# EAGLE board IOTBeev0.22 (EAGLE 6.6.0)
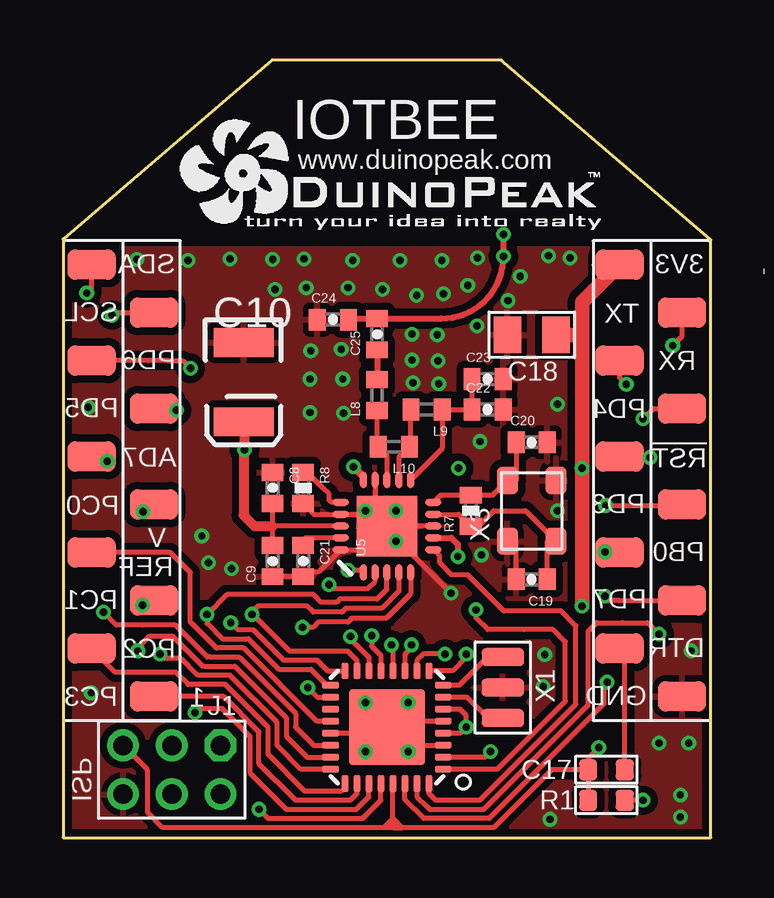
[diagram p0: board, top side]
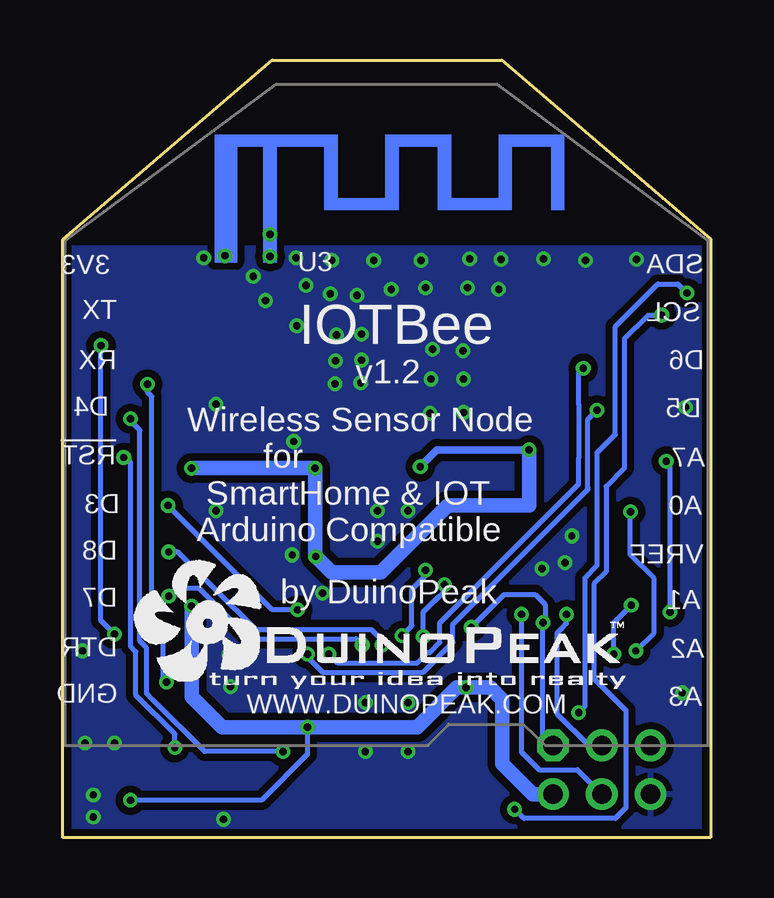
[diagram p1: board, bottom side, seen from below]

Size 26.99 x 32.42 mm. Coordinates in mm from the lower left corner, seen from the top.
Outline: 8.7,32.42 0,24.96 0,0 26.99,0 26.99,24.92 18.26,32.42 8.7,32.42
Copper layers (1*16): Top 0.035mm / dielectric 1.5mm / Bottom 0.035mm
Design rules "Sparkfun *": minimum track width 6mil, minimum drill 12mil, track to track 6mil, track to pad 6mil, pad to pad 6mil, via to via 6mil, smd to smd 0mil, copper to edge 3mil, drill to drill 10mil, minimum pad ring 10mil, minimum via ring 6mil, stop-mask expansion 2mil, vias tented up to drill 30mil, thermal gap 10mil
tRestrict: area 10.7,1.8 to 16.3,7.4

## Footprints (pad centres in the part's own frame; a part is rotated, then mirrored left to right if it is on the bottom)
2.4G-ANT = smd 0.305 x 0.305: 1 0.457,0.254; 2 2.286,0.254
0402-CAP = smd 0.7 x 0.9: 1 -0.65,0; 2 0.65,0
EIA3528 = smd 1.2 x 2.5: A 1.65,0; C -1.65,0
0603_S = smd 0.762 x 0.889: 1 -0.762,0; 2 0.762,0
0805 = smd 1.143 x 1.524: 1 -1.016,0; 2 1.016,0
CK_2X3_2.0 = drill 0.813 pad 1.27 octagon: 1 -1.016,2.032 | drill 0.813 pad 1.27: 2 -1.016,0; 3 -1.016,-2.032; 4 1.016,-2.032; 5 1.016,0; 6 1.016,2.032
C0402 = smd 0.7 x 0.9: 1 -0.65,0; 2 0.65,0
0402-RES = smd 0.7 x 0.9: 1 -0.65,0; 2 0.65,0
MLF32X = smd 0.7 x 0.3: 1 -2.35,1.75; 2 -2.35,1.25; 3 -2.35,0.75; 4 -2.35,0.25; 5 -2.35,-0.25; 6 -2.35,-0.75; 7 -2.35,-1.25; 8 -2.35,-1.75; 17 2.35,-1.75; 18 2.35,-1.25; 19 2.35,-0.75; 20 2.35,-0.25; 21 2.35,0.25; 22 2.35,0.75; 23 2.35,1.25; 24 2.35,1.75 | smd 0.3 x 0.7: 9 -1.75,-2.35; 10 -1.25,-2.35; 11 -0.75,-2.35; 12 -0.25,-2.35; 13 0.25,-2.35; 14 0.75,-2.35; 15 1.25,-2.35; 16 1.75,-2.35; 25 1.75,2.35; 26 1.25,2.35; 27 0.75,2.35; 28 0.25,2.35; 29 -0.25,2.35; 30 -0.75,2.35; 31 -1.25,2.35; 32 -1.75,2.35 | smd 3.175 x 3.175: HEAT 0,0
20P-SMD-2.0-BT = smd 2 x 1.27 bottom: 1 -9.7,9; 2 -12.3,7; 3 -9.7,5; 4 -12.3,3; 5 -9.7,1; 6 -12.3,-1; 7 -9.7,-3; 8 -12.3,-5; 9 -9.7,-7; 10 -12.3,-9; 11 9.7,-9; 12 12.3,-7; 13 9.7,-5; 14 12.3,-3; 15 9.7,-1; 16 12.3,1; 17 9.7,3; 18 12.3,5; 19 9.7,7; 20 12.3,9
QFN20_ALT1 = smd 2.515 x 2.515: 0 0,0 | smd 0.686 x 0.293: 1 -1.925,0.986; 2 -1.925,0.493; 3 -1.925,0; 4 -1.925,-0.493; 5 -1.925,-0.986; 11 1.925,-0.986; 12 1.925,-0.493; 13 1.925,0; 14 1.925,0.493; 15 1.925,0.986 | smd 0.293 x 0.686: 6 -0.986,-1.925; 7 -0.493,-1.925; 8 0,-1.925; 9 0.493,-1.925; 10 0.986,-1.925; 16 0.986,1.925; 17 0.493,1.925; 18 0,1.925; 19 -0.493,1.925; 20 -0.986,1.925
XTAL_3X2 = smd 0.762 x 1.778: 1 -1.27,0; 2 0,0; 3 1.27,0
X3225 = smd 1.143 x 0.889: 1 -1.27,1.016; 2 -1.27,-1.016; 3 1.27,-1.016; 4 1.27,1.016

## Placement (x,y rotation side)
ANT1  [2.4G-ANT]  20.64,23.97 0 bottom
C8  10nF  [0402-CAP]  8.73,14.57 270 top
C9  1nF  [0402-CAP]  8.73,11.53 90 top
C10  10uF  [EIA3528]  7.52,18.99 270 top
C17  100nF  [0603_S]  22.64,2.83 180 top
C18  10u  [0805]  19.53,20.96 180 top
C19  22pF  [0402-CAP]  19.53,10.76 180 top
C20  22pF  [0402-CAP]  19.53,16.48 0 top
C21  33nF  [0402-CAP]  10,11.53 270 top
C22  2.2nF  [0402-CAP]  17.68,17.84 0 top
C23  4.7pF  [0402-CAP]  17.68,19.11 0 top
C24  1.0pF  [0402-CAP]  11.24,21.59 0 top
C25  1.5pF  [0402-CAP]  13.08,20.99 90 top
J1  CK_2X3_2.0  [CK_2X3_2.0]  4.53,2.83 270 top
L8  3.9nH  [C0402]  13.08,18.45 90 top
L9  2.7nH  [C0402]  15.14,17.84 180 top
L10  8.2nH  [C0402]  13.78,16.29 180 top
R1  10k  [0603_S]  22.64,1.56 180 top
R7  1M  [0402-RES]  16.99,13.62 90 top
R8  22K  [0402-RES]  10,14.57 270 top
U1  MEGA8  [MLF32X]  13.49,4.6 180 top
U3  [20P-SMD-2.0-BT]  13.49,14.88 0 bottom
U5  NRF24L01ALT1  [QFN20_ALT1]  13.49,12.99 90 top
U$2  [DUINOPEAK-LOGO-0.6]  4.83,25.34 0 top
U$3  [DUINOPEAK-LOGO-0.7]  24.07,6.19 0 bottom
X1  8MHz  [XTAL_3X2]  18.32,6.25 90 top
X3  16MHz  [X3225]  19.53,13.62 90 top

## Library data of the parts
ANT1 = template (quxiaohui quxiaohui 的冲突副本 2013-09-17)
C8-C10 C19-C25 L8-L10 R7 R8 = SparkFun
C17 C18 R1 X1 X3 = CPT_SMD
J1 = CONNECTER
U1 = ICs_v54
U3 = Duinopeak-Module
U5 = Testing
U$2 U$3 = Duinopeak-Logo

## Nets
!RESET: C17.2 J1.3 R1.2 U1.29 U3.5
+3V3: C8.2 C9.2 C10.A C18.1 J1.6 R1.1 U1.4 U1.6 U1.18 U3.1 U5.7 U5.15 U5.18
ADC6: U1.19
ADC7: U1.22 U3.16
ANT: ANT1.2 C24.2 C25.2
AREF: U1.20 U3.14
CE: U1.13 U5.1
CSN: U1.14 U5.2
DTR: C17.1 U3.9
GND: ANT1.1 C8.1 C9.1 C10.C C18.2 C19.2 C20.2 C21.2 C22.2 C23.2 C24.1 J1.4 R8.2 U1.3 U1.5 U1.21 U1.HEAT U3.10 U5.0 U5.8 U5.14 U5.17 U5.20 X1.2 X3.1 X3.3
IRQ: U1.32 U5.6
MISO: J1.1 U1.16 U5.5
MOSI: J1.5 U1.15 U5.4
N$11: U1.7 X1.1
N$13: U1.8 X1.3
N$19: C19.1 R7.1 U5.9 X3.2
N$20: C20.1 R7.2 U5.10 X3.4
N$22: L8.1 L10.2 U5.13
N$23: C22.1 C23.1 L9.1 U5.11
N$24: R8.1 U5.16
N$25: C21.1 U5.19
N$26: L9.2 L10.1 U5.12
N$27: C25.1 L8.2
PB0: U1.12 U3.7
PC0: U1.23 U3.15
PC1: U1.24 U3.13
PC2: U1.25 U3.12
PC3: U1.26 U3.11
PD3: U1.1 U3.6
PD4: U1.2 U3.4
PD5: U1.9 U3.17
PD6: U1.10 U3.18
PD7: U1.11 U3.8
RX: U1.30 U3.3
SCK: J1.2 U1.17 U5.3
SCL: U1.28 U3.19
SDA: U1.27 U3.20
TX: U1.31 U3.2

## Tracks (layer width: path | path; a pad name or v marks a point on that pad's centre or on a via)
!RESET  (via drill 0.3)
  Top 0.203: J1.3 3.52,2.81 3.52,1.05 4.16,0.41 13.75,0.41 | 13.75,0.41 13.74,0.42 | 13.24,0.41 13.37,0.41 13.75,0.79 | 13.75,0.79 13.75,0.67 | 13.75,0.67 13.62,0.54 13.87,0.54 13.75,0.41 | 13.75,0.41 14.13,0.41 | 14.13,0.41 13.75,0.79 | U1.29 13.74,0.67 13.75,0.67 | 14.13,0.41 17.94,0.41 20.35,2.83 C17.2 | C17.2 R1.2 | U3.5 23.23,15.84 v24.45,15.84 | C17.2 21.88,3.3 v22.32,3.75
  Bottom 0.203: v22.32,3.75 22.32,4.32 23.94,5.94 23.94,7.75 24.16,7.97 24.16,15.56 arc-90 v24.45,15.84
+3V3  (via drill 0.3)
  Top 0.203: U1.4 16.54,4.35 v16.8,4.61 16.8,5.1 16.54,5.35 U1.6 | v24.16,1.56 R1.1 | U1.18 10.59,5.85 v10.19,6.25 | U5.18 8.73,12.99 | 8.73,12.99 C8.2 | C9.2 8.73,12.99
  Top 0.254: U5.7 16.18,12.49 16.45,12.22 v16.45,11.72
  Top 0.305: U5.15 12.51,15.05 v12.1,15.46
  Top 0.406: 8.73,12.99 7.97,12.99 7.53,13.43 7.56,13.46 v7.56,16.16 7.56,17.3 C10.A
  Top 0.61: v21.62,9.65 v21.62,15.4 21.62,19.84 21.62,21.24 | 21.62,21.24 21.62,21.46 21.62,22.32 U3.1 | C18.1 21.34,20.95 arc90 21.62,21.24
  Bottom 0.203: v24.16,1.56 18.7,1.56 16.8,3.46 v16.8,4.61
  Bottom 0.305: v12.1,15.46 11.4,16.16 v7.56,16.16
  Bottom 0.61: v21.62,15.4 v16.48,15.4 16.48,11.75 v16.45,11.72 15.78,11.05 13.75,11.05 10.95,13.84 7.56,13.84 v7.56,16.16 | J1.6 7.4,1.81 8.67,3.08 8.67,5.75 9.18,6.25 v10.19,6.25 10.57,6.25 12.22,4.6 v16.79,4.6 v16.8,4.61 v16.8,4.6 20.35,4.6 21.62,5.87 v21.62,9.65
ADC7  (via drill 0.3)
  Top 0.203: U1.22 10.43,3.85 9.68,4.6 9.68,5.17 7.33,7.52 6.13,7.52 6,7.52 5.33,8.19 4.67,8.86 3.3,8.86 2.22,8.86 v1.68,9.4 | v1.84,15.68 1.39,15.68 U3.16
  Bottom 0.203: v1.68,9.4 1.68,15.53 v1.84,15.68
ANT  (via drill 0.3)
  Top 0.254: C24.2 11.94,21.64 C25.2 15.76,21.64 arc90 ANT1.2 v18.35,25.15
  Bottom 0.254: 18.35,25.18 arc-90 18.41,25.24 18.32,25.24 arc-90 18.29,25.27 18.29,24.29 arc90 ANT1.2
  other vias: 18.35,24.23
AREF
  Top 0.203: U1.20 10.58,4.85 7.52,7.91 6.38,7.91 5.3,8.99 5.3,11.05 4.47,11.88 U3.14
CE  (via drill 0.3)
  Top 0.203: U1.13 13.24,7.58 12.86,7.97 v12.86,8.41 | U5.1 12.42,11.14 v11.87,11.14
  Bottom 0.203: v12.86,8.41 12.45,8.83 12.45,10.32 12.45,10.35 11.87,10.92 v11.87,11.14
CSN  (via drill 0.3)
  Top 0.203: U1.14 12.74,7.51 11.97,8.29 v11.97,8.38 | v11.08,10.54 11.24,10.38 12.7,10.38 13,10.68 U5.2
  Bottom 0.203: v11.97,8.38 11.97,9.4 | 11.97,9.4 11.33,10.03 | 11.97,9.4 11.08,10.29 v11.08,10.54
DTR
  Top 0.203: C17.1 23.4,7.88 U3.9
GND  (via drill 0.3)
  Top 0.203: U1.21 13.24,4.35 U1.HEAT | U1.5 13.74,4.85 U1.HEAT | U1.3 14.24,3.85 U1.HEAT | v14.38,3.59 14.38,3.71 U1.HEAT | v14.38,5.62 14.38,5.49 U1.HEAT | v16.16,10.19 14,12.35 v13.87,12.35 13.87,12 U5.20 10.65,11.08 10,11.08 | C19.2 18.88,12.35 X3.1 | R8.2 10.45,13.48 U5.17 12.6,13.48 v12.6,13.62 13,14.02 U5.14 | C9.1 C21.2 10,11.08 | U5.8 13.87,12.99 v13.87,13.62 | 10,11.08 9.94,11.08 9.97,11.11 10.06,11.11 10.03,11.08 10,11.08
  Top 0.406: 12.6,13.48 13,13.48 U5.0 | U5.0 13.49,12.73 v13.87,12.35 | 13.87,12.99 U5.0
  other vias: 17.43,11.78 7.02,11.21 20,6.29 5.78,12.57 6.06,11.46 12.6,3.59 12.6,5.62 17.37,16.51 20.61,13.62 20.61,18.07 3.08,24.1 5.21,24.07 13.3,22.86 10.29,19.11 15.78,24.07 18.54,22.38 21.11,24.16 25.72,0.86 20.29,0.76 25.72,1.78 17.27,24.16 10.03,24.13 14.54,20.99 14.54,19.91 19.05,23.4 16.86,23.02 24.83,3.94 26.07,3.94 1.17,6.03 1.05,17.94 26.16,7.78 11.59,20.35 11.65,19.11 11.68,17.68 10.29,17.72 15.84,22.67 14.73,22.61 6.95,24.13 8.73,24.1 14.03,24.07 12.07,24.07 20.07,7.62 15.59,20.96 15.62,19.88 11.87,22.92 10.13,22.92 20.22,24.26 10.32,20.29 17.24,21.34 14.57,18.95 15.65,18.92 8.83,22.86
  pour Top (isolate 0.305): -0.19,24.54 26.8,24.54 26.83,-0.35 -0.16,-0.35
  pour Bottom (isolate 0.305): -0.19,24.57 26.8,24.57 26.83,-0.35 -0.16,-0.35
IRQ
  Top 0.203: U1.32 15.24,1.84 15.53,1.56 17.37,1.56 19.97,4.16 21.37,5.56 21.37,8.83 20.75,9.45 18.37,9.45 16.86,10.95 16.19,10.95 15.68,11.46 15.68,11.73 U5.6
MISO  (via drill 0.3)
  Top 0.203: v6.98,8.95 7.27,8.67 7.91,8.67 9.18,7.4 10.57,7.4 11.02,6.95 U1.16 | U5.5 14.48,10.16 13.46,9.14 12.03,9.14 11.87,8.99 10.64,8.99 10.41,8.76 v9.97,8.76
  Bottom 0.203: J1.1 6.89,4.17 6.98,4.27 v6.98,8.95 6.89,9.05 6.89,9.72 7.3,10.13 8.6,10.13 v9.97,8.76
MOSI  (via drill 0.3)
  Top 0.203: U1.15 12.24,7.38 11.84,7.78 9.43,7.78 7.91,9.3 v7.87,9.3 7.87,9.4 8.13,9.65 10.16,9.65 10.41,9.4 11.62,9.4 11.78,9.56 13.27,9.56 13.99,10.27 U5.4
  Bottom 0.203: J1.5 5.54,2.83 7.14,2.83 7.78,3.46 7.87,3.56 v7.87,9.3
N$11
  Top 0.203: U1.7 16.82,5.85 17.68,4.98 X1.1
N$13
  Top 0.203: U1.8 16.51,6.35 17.68,7.52 X1.3
N$19
  Top 0.203: C19.1 20.18,12.35 X3.2 19.27,13.62 17.94,13.62 17.29,12.97 R7.1 16.48,13.48 U5.9
N$20
  Top 0.203: 18.88,15.26 X3.4 | C20.1 18.88,14.89 X3.4 | X3.4 17.89,14.27 R7.2 15.72,14.27 U5.10
N$22
  Top 0.203: U5.13 13.49,15.92 L10.2 13.08,16.34 L8.1
N$23
  Top 0.203: C23.1 C22.1 L9.1 15.79,16.23 U5.11
N$24
  Top 0.203: U5.16 11.17,13.97 11.08,14.06 11.08,14.32 10.83,14.57 10.18,15.22 R8.1
N$25
  Top 0.203: U5.19 10.1,12.49 arc90 C21.1
N$26
  Top 0.203: U5.12 13.99,15.84 L10.1 14.49,16.35 L9.2
N$27
  Top 0.254: C25.1 L8.2
PB0  (via drill 0.3)
  Top 0.203: U1.12 13.74,7.97 v13.68,8.03 | v22.57,11.91 22.6,11.88 U3.7
  Bottom 0.203: v13.68,8.03 13.68,8.22 14.13,8.67 18.95,8.67 20.61,10.32 22.19,11.91 v22.57,11.91
PC0  (via drill 0.3)
  Top 0.203: U1.23 10.17,3.35 9.3,4.22 9.3,4.98 7.14,7.14 5.87,7.14 5.81,7.14 5.14,7.81 4.57,8.38 3.59,8.38 3.11,7.91 v3.11,7.78 | v3.33,13.59 3.63,13.88 U3.15
  Bottom 0.203: v3.11,7.78 2.35,8.54 2.35,10.79 3.33,11.78 v3.33,13.59
PC1  (via drill 0.3)
  Top 0.203: U1.24 9.91,2.85 8.92,3.84 8.92,4.79 6.95,6.76 5.62,6.76 4.92,7.46 4.35,7.46 4.22,7.46 v4.03,7.65 | v3.3,9.68 3.59,9.68 U3.13
  Bottom 0.203: v4.03,7.65 4.03,8.95 v3.3,9.68
PC2
  Top 0.203: U1.25 11.74,2.09 11.59,1.94 10.06,1.94 8.54,3.46 8.54,4.6 6.76,6.38 5.37,6.38 5.21,6.38 4.7,6.89 2.18,6.89 U3.12
PC3
  Top 0.203: U1.26 12.24,1.83 11.97,1.56 9.68,1.56 8.16,3.08 8.16,4.41 6.69,5.88 U3.11
PD3  (via drill 0.3)
  Top 0.203: U1.1 18.09,2.85 19.59,4.35 20.92,5.68 20.92,8.16 20.41,8.67 19.21,8.67 17.68,8.67 17.21,9.14 v17.21,9.49 | v22.61,13.84 25.75,13.84 U3.6
  Bottom 0.203: v17.21,9.49 18.26,9.49 v22.61,13.84
PD4  (via drill 0.3)
  Top 0.203: U1.2 17.58,3.35 v17.81,3.59 | v24.16,17.46 24.58,17.88 U3.4
  Bottom 0.203: v17.81,3.59 21.08,3.59 23.24,5.75 23.49,6 23.49,7.91 23.78,8.19 23.78,16.99 24.16,17.37 v24.16,17.46
PD5  (via drill 0.3)
  Top 0.203: v4.73,17.81 4.65,17.89 4.65,17.88 U3.17 | U1.9 16.22,6.95 16.8,7.52 v16.8,7.65
  Bottom 0.203: v4.73,17.81 5.11,17.43 5.11,14.57 5.11,14.51 10.73,8.89 10.73,8.13 11.97,6.89 16.16,6.89 16.8,7.52 v16.8,7.65
PD6  (via drill 0.3)
  Top 0.203: U1.10 14.74,7.38 15.02,7.65 v15.91,7.65 | U3.18 3.55,19.88 4.37,19.88 4.98,19.88 v5.3,19.56
  Bottom 0.203: v15.91,7.65 15.53,7.27 12.22,7.27 11.78,7.71 11.68,7.71 11.27,8.13 11.27,8.95 5.49,14.73 5.49,14.89 5.49,15.81 5.49,18.07 5.49,18.76 5.49,19.37 v5.3,19.56
PD7  (via drill 0.3)
  Top 0.203: U1.11 14.24,7.64 14.51,7.91 v14.51,8.03 | U3.8 23.17,9.88 22.75,9.88 v22.57,10.06
  Bottom 0.203: v14.51,8.03 14.76,8.29 19.21,8.29 20.81,9.89 20.83,9.91 21.3,10.38 22.16,10.38 22.26,10.38 v22.57,10.06
RX  (via drill 0.3)
  Top 0.203: U1.30 14.24,1.57 15.02,0.79 17.75,0.79 22.54,5.59 22.54,6.35 v22.67,6.48 | v23.46,18.89 23.19,19.17 U3.3
  Bottom 0.203: v23.46,18.89 23.46,18.57 23.27,18.38 23.27,8.6 22.83,8.16 22.83,6.64 v22.67,6.48
SCK  (via drill 0.3)
  Top 0.203: v6,9.3 6,8.92 6.64,8.29 7.71,8.29 8.99,7.02 10.32,7.02 10.98,6.35 U1.17 | 6.25,9.56 v6,9.3 | v6,9.3 6.83,10.13 10.45,10.13 10.76,9.81 11.4,9.81 11.53,9.94 13.08,9.94 13.49,10.35 U5.3
  Bottom 0.203: J1.2 5.08,3.84 6.38,5.14 6.38,8.54 6.16,8.76 6,8.92 v6,9.3
SCL  (via drill 0.3)
  Top 0.203: U1.28 13.24,1.56 12.48,0.79 8.54,0.79 v8.16,1.17 | v2.03,21.78 2.14,21.88 U3.19
  Bottom 0.203: v8.16,1.17 7.78,0.79 3.97,0.79 3.52,1.24 3.52,5.3 4.86,6.64 4.86,10.57 4.35,11.08 4.35,14.64 3.59,15.4 3.59,20.8 2.6,21.78 v2.03,21.78
SDA  (via drill 0.3)
  Top 0.203: U1.27 12.74,1.69 12.22,1.17 9.3,1.17 7.78,2.7 7.78,4.22 6.64,5.37 5.65,5.37 v5.49,5.21 | v0.98,22.7 1.19,22.9 U3.20
  Bottom 0.203: v0.98,22.7 1.24,22.96 1.36,23.08 2.19,23.08 3.97,21.3 3.97,16.8 4.73,16.03 4.73,11.33 5.24,10.83 5.24,6 5.24,5.78 5.24,5.46 v5.49,5.21
TX  (via drill 0.3)
  Top 0.203: U1.31 14.74,1.7 15.14,1.3 15.27,1.17 17.53,1.17 21.88,5.52 21.88,8.6 22.22,8.95 23.3,8.95 24.35,8.95 v24.83,8.48 | v25.4,20.51 25.79,20.9 U3.2
  Bottom 0.203: v24.83,8.48 25.4,9.05 v25.4,20.51

## Text on the board
tPlace: IOTBEE | www.duinopeak.com | SDA | 3V3 | SCL | TX | PD6 | RX | PD5 | PD4 | AD7 | !RST | PC0 | PD3 | PB0 | V / REF | PC1 | PD7 | PC2 | DTR | PC3 | 1 | GND | ISP
bPlace: SDA | 3V3 | SCL | TX | IOTBee | D6 | RX | v1.2 | D5 | D4 | A7 | !RST | A0 | D3 | VREF | Wireless Sensor Node / for / SmartHome & IOT / Arduino Compatible | D8 | A1 | by DuinoPeak | D7 | A2 | DTR | A3 | GND | WWW.DUINOPEAK.COM